# Altium PCB DUTBoard_Sandbox.PcbDoc (part 6 of 6)
Units mil, origin at the board's own origin, x right, y up, seen from the top; angles counter-clockwise.
Board outline 5475 x 5475 mil, 4 copper layers (Top Layer, Mid-Layer 1, Mid-Layer 2, Bottom Layer); 89 components, 507 nets, 1705 pads, 1204 vias.
Unrouted connection lines stored in the file: 6.
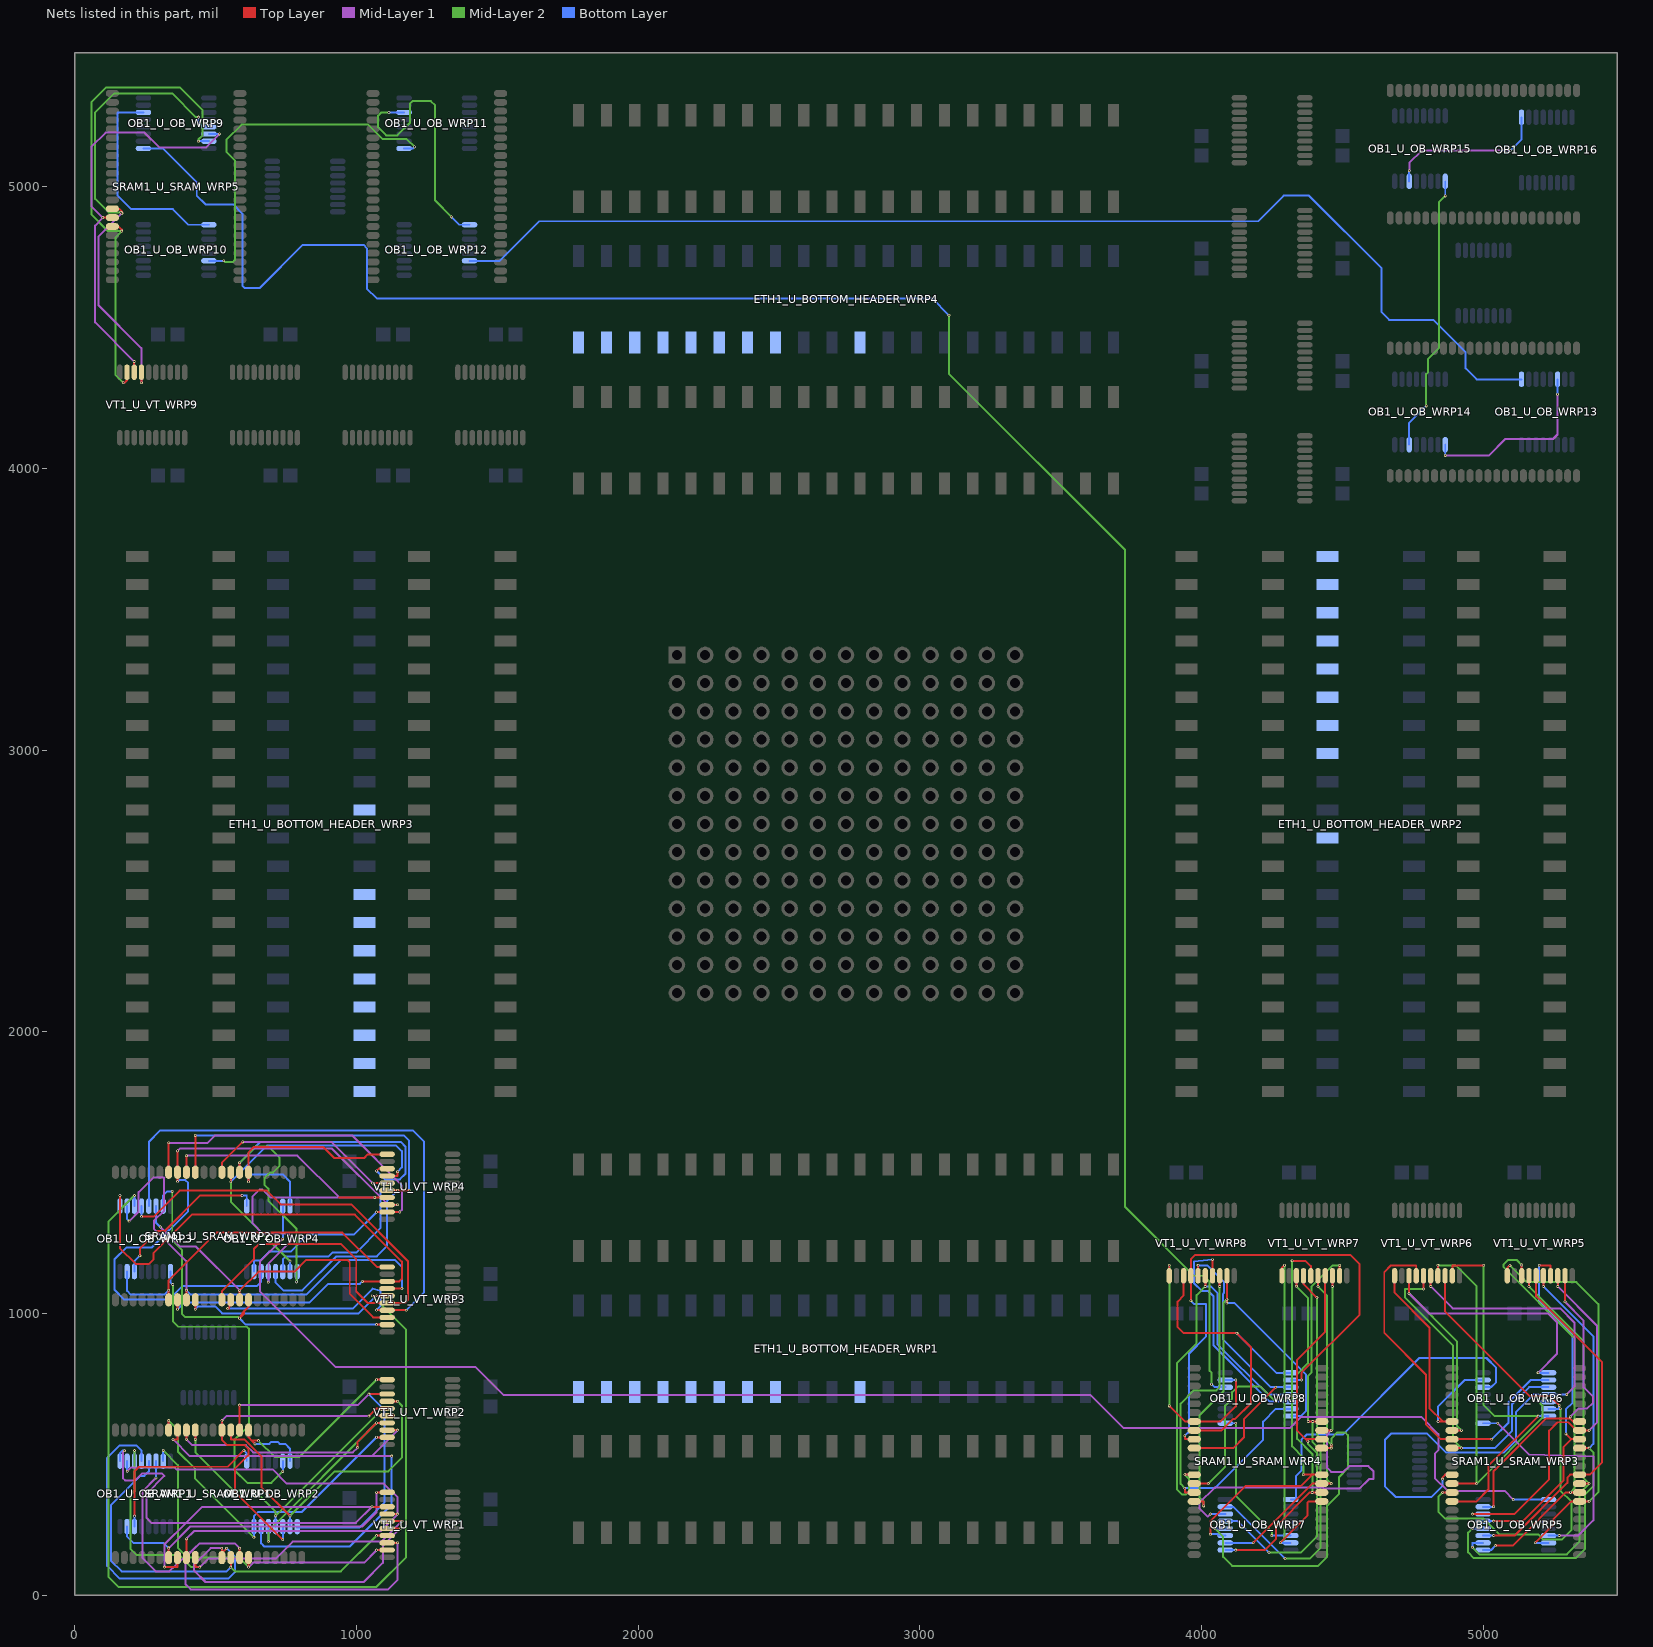
[diagram p8: the nets of this part, all layers, seen from the top]

## Via types
v1: diameter 10, hole 5, Top Layer to Bottom Layer, 1204 vias

## Nets (pads, with @x,y where several pads share a name; then routed paths per layer and width w, separated by ;. In a path a pad name is that pad's centre, name@x,y a point inside that pad or via, vN(x,y) a via of type N, cw(c..) or ccw(c..) an arc to the next point about the centre after c; other vN are vias at no path point) (continued)
OB_D_B61: OB1_U_OB_WRP9.D5 SRAM1_U_SRAM_WRP5.DATA13 VT1_U_VT_WRP9.OVL5 | length 1695.2
  Top Layer w7: SRAM1_U_SRAM_WRP5.DATA13@133.62,4921.26 157.98,4921.26 v1@167.24,4912 ; v1(163.87,4908.63) v1@167.24,4912 ; v1(167.24,4905.26) v1@167.24,4912 ; v1(236.61,4304) VT1_U_VT_WRP9.OVL5@236.61,4341.14
  Mid-Layer 1 w7: v1(167.24,4905.26) 85,4823.02 85,4578 236.61,4426.39 v1(236.61,4304)
  Mid-Layer 2 w7: v1(163.87,4908.63) 120.37,4908.63 72.5,4956.5 72.5,5263.12 140.38,5331 345.5,5331 430,5246.5 v1(439,5246.5)
  Bottom Layer w7: v1(439,5246.5) 439,5221.2 OB1_U_OB_WRP9.D5@476.14,5212.2
OB_D_B62: OB1_U_OB_WRP9.D6 SRAM1_U_SRAM_WRP5.DATA14 VT1_U_VT_WRP9.OVL6 | length 1476.1
  Top Layer w7: v1(100,4889.76) SRAM1_U_SRAM_WRP5.DATA14@133.62,4889.76 ; VT1_U_VT_WRP9.OVL6@211.02,4341.14 v1(211.02,4379)
  Mid-Layer 1 w7: v1(211.02,4379) 72,4518.02 72,4861.76 v1(100,4889.76) 59,4930.76 59,5141 109.52,5191.52 247.48,5191.52 301,5138 465,5138 v1(514,5187)
  Bottom Layer w7: OB1_U_OB_WRP9.D6@476.14,5186.61 513.61,5186.61 v1(514,5187)
OB_D_B63: OB1_U_OB_WRP9.D7 SRAM1_U_SRAM_WRP5.DATA15 VT1_U_VT_WRP9.OVL7 | length 1781.5
  Top Layer w7: SRAM1_U_SRAM_WRP5.DATA15@133.62,4858.27 156,4858.27 167,4847.27 v1(167,4842) ; v1(172,4304) 177.43,4304 185.43,4312 VT1_U_VT_WRP9.OVL7@185.43,4341.14
  Mid-Layer 2 w7: v1(172,4304) 145,4331 145,4820 v1(167,4842) 118,4842 59.5,4900.5 59.5,5300.5 111,5352 373,5352 453.5,5271.5 453.5,5181.7 439,5167.2 v1(439,5161)
  Bottom Layer w7: v1(439,5161) OB1_U_OB_WRP9.D7@476.14,5161.02
OB_D_B64: OB1_U_OB_WRP8.D0 SRAM1_U_SRAM_WRP4.DATA0 VT1_U_VT_WRP8.OVL0 | length 948
  Top Layer w7: VT1_U_VT_WRP8.OVL0@3884.84,1133.86 3884.84,1170.84 v1(3885,1171) ; v1(3885,672) 3940.27,616.73 SRAM1_U_SRAM_WRP4.DATA0@3973.62,616.73 4067.24,616.73 4121,670.49 v1(4121,763.98)
  Mid-Layer 2 w7: v1(3885,672) v1(3885,1171)
  Bottom Layer w7: OB1_U_OB_WRP8.D0@4083.86,763.98 v1(4121,763.98)
OB_D_B65: OB1_U_OB_WRP8.D1 SRAM1_U_SRAM_WRP4.DATA1 VT1_U_VT_WRP8.OVL1 | length 1170.2
  Top Layer w7: VT1_U_VT_WRP8.OVL1@3936.02,1133.86 3936.02,1064 3914.5,1042.48 3914.5,951.5 3936,930 v1(4125,930) 4175,880 4175,682 4119,626 4112,626 4071.24,585.24 SRAM1_U_SRAM_WRP4.DATA1@3973.62,585.24
  Bottom Layer w7: v1(4125,930) 4265.43,789.57 OB1_U_OB_WRP8.D1@4316.14,789.57
OB_D_B66: OB1_U_OB_WRP8.D2 SRAM1_U_SRAM_WRP4.DATA2 VT1_U_VT_WRP8.OVL2 | length 1903.7
  Top Layer w7: v1(3940,566) 3940,553.74 SRAM1_U_SRAM_WRP4.DATA2@3973.62,553.74 ; v1(3961.61,1045.18) VT1_U_VT_WRP8.OVL2@3961.61,1133.86 3961.61,1192 3977.61,1208 4528,1208 4561,1175 4561,996 4354,789 v1(4354,763.98)
  Bottom Layer w7: v1(3940,566) 3955,581 3955,858 4014.5,917.5 4014.5,1034.5 3972.3,1034.5 v1(3961.61,1045.18) ; OB1_U_OB_WRP8.D2@4316.14,763.98 v1(4354,763.98)
OB_D_B67: OB1_U_OB_WRP8.D3 SRAM1_U_SRAM_WRP4.DATA3 VT1_U_VT_WRP8.OVL3 | length 1087.4
  Top Layer w7: SRAM1_U_SRAM_WRP4.DATA3@3973.62,522.24 4112,522.24 4149.61,559.86 4149.61,625 v1(4263,738.39) ; VT1_U_VT_WRP8.OVL3@3987.2,1133.86 v1(3987.2,1171)
  Bottom Layer w7: v1(3987.2,1171) 4020,1171 4079,1112 4079,1073 4075,1069 4075,908.23 4244.84,738.39 v1(4263,738.39) OB1_U_OB_WRP8.D3@4316.14,738.39
OB_D_B68: OB1_U_OB_WRP8.D4 SRAM1_U_SRAM_WRP4.DATA4 VT1_U_VT_WRP8.OVL4 | length 1522.5
  Top Layer w7: v1(3940.24,428) 3940.49,427.76 SRAM1_U_SRAM_WRP4.DATA4@3973.62,427.76 ; v1(4012.8,1096) VT1_U_VT_WRP8.OVL4@4012.8,1133.86
  Mid-Layer 2 w7: v1(3940.24,428) 3955,413.24 3955,368 3945,358 3930,358 3912,376 3912,824 3982,894 3982,1065.2 v1(4012.8,1096)
  Bottom Layer w7: v1(4012.8,1096) 4032.99,1096 4055.49,1073.5 4055.49,891.51 4234.2,712.8 OB1_U_OB_WRP8.D4@4316.14,712.8
OB_D_B69: OB1_U_OB_WRP8.D5 SRAM1_U_SRAM_WRP4.DATA5 VT1_U_VT_WRP8.OVL5 | length 1416
  Top Layer w7: SRAM1_U_SRAM_WRP4.DATA5@3973.62,396.26 v1(4024,396.26) ; VT1_U_VT_WRP8.OVL5@4038.39,1133.86 v1(4038.39,1192)
  Mid-Layer 2 w7: v1(4024,396.26) 4083,455.26 4083,673 4108.34,698.34 4108.34,720.64 4128,740.3 4209.7,740.3 v1(4263,687)
  Bottom Layer w7: v1(4038.39,1192) 3972,1184 3972,1108.3 4000.3,1080 4022.5,1080 4042,1060.5 4042,886.61 4241.41,687.2 v1@4263.2,687.2 ; v1(4263,687) v1@4263.2,687.2 ; OB1_U_OB_WRP8.D5@4316.14,687.2 v1@4263.2,687.2
OB_D_B70: OB1_U_OB_WRP8.D6 SRAM1_U_SRAM_WRP4.DATA6 VT1_U_VT_WRP8.OVL6 | length 1443.5
  Top Layer w7: v1(3940,380) 3940,365 3940.24,364.76 SRAM1_U_SRAM_WRP4.DATA6@3973.62,364.76 ; v1(4063.98,1096) VT1_U_VT_WRP8.OVL6@4063.98,1133.86
  Mid-Layer 2 w7: v1(3940,380) 3925,395 3925,680 3972,727 4052,727 4063.98,738.98 v1(4063.98,1096)
  Bottom Layer w7: v1(3940,380) 4046,380 4218,552 4218,616 4263.61,661.61 OB1_U_OB_WRP8.D6@4316.14,661.61
OB_D_B71: OB1_U_OB_WRP8.D7 SRAM1_U_SRAM_WRP4.DATA7 VT1_U_VT_WRP8.OVL7 | length 1503.3
  Top Layer w7: SRAM1_U_SRAM_WRP4.DATA7@3973.62,333.27 4007.24,333.27 v1(4007.24,317.27) ; v1(4089.57,1037) v1(4089.57,1050) VT1_U_VT_WRP8.OVL7@4089.57,1133.86
  Mid-Layer 2 w7: v1(4007.24,317.27) 4007.24,333.27 3992,348.51 3992,638 4077.5,723.5 4077.5,1037.93 v1(4089.57,1050)
  Bottom Layer w7: v1(4089.57,1037) 4117,1037 4371,783 4371,655.02 4352,636.02 OB1_U_OB_WRP8.D7@4316.14,636.02
OB_D_B72: OB1_U_OB_WRP7.D0 SRAM1_U_SRAM_WRP4.DATA8 VT1_U_VT_WRP7.OVL0 | length 1304.2
  Top Layer w7: v1(4279,186) 4375.23,282.23 4375.23,327.5 4381,333.27 SRAM1_U_SRAM_WRP4.DATA8@4426.38,333.27 ; VT1_U_VT_WRP7.OVL0@4284.84,1133.86 4284.84,1161.84 v1(4294,1171)
  Mid-Layer 2 w7: v1(4279,186) 4294,201 v1(4294,1171)
  Bottom Layer w7: v1(4279,186) OB1_U_OB_WRP7.D0@4316.14,186.02
OB_D_B73: OB1_U_OB_WRP7.D1 SRAM1_U_SRAM_WRP4.DATA9 VT1_U_VT_WRP7.OVL1 | length 1277.8
  Top Layer w7: v1(4121,160) 4224,160 4264,200 4264,244.76 4384,364.76 v1(4392.76,364.76) SRAM1_U_SRAM_WRP4.DATA9@4426.38,364.76 ; v1(4336.02,1096.51) VT1_U_VT_WRP7.OVL1@4336.02,1133.86
  Mid-Layer 2 w7: v1(4336.02,1096.51) 4377,1055.53 4377,823 4339,785 4339,555 4392.76,501.24 v1(4392.76,364.76)
  Bottom Layer w7: OB1_U_OB_WRP7.D1@4083.86,160.43 4120.57,160.43 v1(4121,160)
OB_D_B74: OB1_U_OB_WRP7.D2 SRAM1_U_SRAM_WRP4.DATA10 VT1_U_VT_WRP7.OVL2 | length 1241.6
  Top Layer w7: v1(4182.76,186.02) 4393,396.26 SRAM1_U_SRAM_WRP4.DATA10@4426.38,396.26 v1(4460,396.26) ; VT1_U_VT_WRP7.OVL2@4361.61,1133.86 4361.61,1104 v1(4409,1056.61)
  Mid-Layer 2 w7: v1(4409,1056.61) 4409,570.72 4434.38,545.34 4434.38,520.06 4444.04,510.4 4444.04,412.22 v1(4460,396.26)
  Bottom Layer w7: OB1_U_OB_WRP7.D2@4083.86,186.02 v1(4182.76,186.02)
OB_D_B75: OB1_U_OB_WRP7.D3 SRAM1_U_SRAM_WRP4.DATA11 VT1_U_VT_WRP7.OVL3 | length 1481.1
  Top Layer w7: v1(4031,216.5) 4031,263 4156.18,388.18 4353.42,388.18 4393,427.76 ; v1(4321,1187) 4368,1187 4387.2,1167.8 VT1_U_VT_WRP7.OVL3@4387.2,1133.86 ; v1(4360.76,427.76) 4393,427.76 ; SRAM1_U_SRAM_WRP4.DATA11@4426.38,427.76 4393,427.76
  Mid-Layer 2 w7: v1(4321,1187) 4321,528 4360.76,488.24 v1(4360.76,427.76)
  Bottom Layer w7: v1(4031,216.5) 4055.61,216.5 4060.5,211.61 OB1_U_OB_WRP7.D3@4083.86,211.61
OB_D_B76: OB1_U_OB_WRP7.D4 SRAM1_U_SRAM_WRP4.DATA12 VT1_U_VT_WRP7.OVL4 | length 1780.4
  Top Layer w7: v1(4412.8,1096) VT1_U_VT_WRP7.OVL4@4412.8,1133.86 ; SRAM1_U_SRAM_WRP4.DATA12@4426.38,522.24 v1(4460,522.24) v1(4460,534)
  Mid-Layer 2 w7: v1(4046,237.2) 4076,207.2 4076,136 4108,104 4413,104 4445,136 4445,318 4488,361 4488,419.66 4519,450.66 4519,568 4509,578 4482,578 4460,556 v1(4460,534) ; v1(4412.8,1096) 4445,1063.8 4445,558.34 4448.66,554.68 4448.66,545.34 v1(4460,534) ; v1(4460,522.24) v1(4460,534)
  Bottom Layer w7: v1(4046,237.2) OB1_U_OB_WRP7.D4@4083.86,237.2
OB_D_B77: OB1_U_OB_WRP7.D5 SRAM1_U_SRAM_WRP4.DATA13 VT1_U_VT_WRP7.OVL5 | length 1447.5
  Top Layer w7: v1(4377,546) 4369.26,553.74 ; SRAM1_U_SRAM_WRP4.DATA13@4426.38,553.74 4369.26,553.74 ; VT1_U_VT_WRP7.OVL5@4438.39,1133.86 4438.39,935 4339,835.61 4339,584 4369.26,553.74
  Mid-Layer 2 w7: v1(4238.88,151.92) 4353.08,151.92 4409,207.84 4409,506.23 4377,538.23 v1(4377,546)
  Bottom Layer w7: OB1_U_OB_WRP7.D5@4083.86,262.8 4128,262.8 v1(4238.88,151.92)
OB_D_B78: OB1_U_OB_WRP7.D6 SRAM1_U_SRAM_WRP4.DATA14 VT1_U_VT_WRP7.OVL6 | length 1720.2
  Top Layer w7: SRAM1_U_SRAM_WRP4.DATA14@4426.38,585.24 4459.76,585.24 v1(4460,585) ; v1(4463.98,1096) VT1_U_VT_WRP7.OVL6@4463.98,1133.86
  Mid-Layer 1 w7: v1(4031,288.39) 4021.61,279 3992,308.61 3992,328 4046,382 4430,382 4434,378 4560,378 4594.5,412.5 4609.11,412.5 4609.11,440.89 4592,458 4523,458 4502.7,437.7 4459.3,437.7 4445,452 4445,570 v1(4460,585)
  Mid-Layer 2 w7: v1(4460,585) 4463.98,588.98 v1(4463.98,1096)
  Bottom Layer w7: v1(4031,288.39) OB1_U_OB_WRP7.D6@4083.86,288.39
OB_D_B79: OB1_U_OB_WRP7.D7 SRAM1_U_SRAM_WRP4.DATA15 VT1_U_VT_WRP7.OVL7 | length 1590.8
  Top Layer w7: v1(4378,616.73) v1(4394,616.73) SRAM1_U_SRAM_WRP4.DATA15@4426.38,616.73 ; VT1_U_VT_WRP7.OVL7@4489.57,1133.86 4489.57,1170.13 v1(4490,1170.57)
  Mid-Layer 2 w7: v1(4295.98,130) 4384,130 4422,168 4422,515 4394,543 v1(4394,616.73) ; v1(4378,616.73) 4378,779 4390,791 4390,1096 4464.57,1170.57 v1(4490,1170.57)
  Bottom Layer w7: OB1_U_OB_WRP7.D7@4083.86,313.98 4112,313.98 v1(4295.98,130)
OB_D_B80: OB1_U_OB_WRP6.D0 SRAM1_U_SRAM_WRP3.DATA0 VT1_U_VT_WRP6.OVL0 | length 889.4
  Top Layer w7: VT1_U_VT_WRP6.OVL0@4684.84,1133.86 4684.84,1074 4808.5,950.34 4808.5,663.5 4855.27,616.73 ; v1(4839,616.73) 4855.27,616.73 ; SRAM1_U_SRAM_WRP3.DATA0@4888.62,616.73 4855.27,616.73
  Bottom Layer w7: v1(4839,616.73) 4839,670 4932.98,763.98 OB1_U_OB_WRP6.D0@4998.86,763.98
OB_D_B81: OB1_U_OB_WRP6.D1 SRAM1_U_SRAM_WRP3.DATA1 VT1_U_VT_WRP6.OVL1 | length 1471.5
  Top Layer w7: v1(4736.02,1071) VT1_U_VT_WRP6.OVL1@4736.02,1133.86 ; SRAM1_U_SRAM_WRP3.DATA1@4888.62,585.24 v1(4922.24,585.24)
  Mid-Layer 1 w7: v1(4736.02,1071) 4807.02,1000 5230,1000 5262,968 5262,858 v1(5194,790)
  Mid-Layer 2 w7: v1(4736.02,1071) 4907,900.02 4907,600.48 v1(4922.24,585.24)
  Bottom Layer w7: v1(5194,790) 5194.43,789.57 OB1_U_OB_WRP6.D1@5231.14,789.57
OB_D_B82: OB1_U_OB_WRP6.D2 SRAM1_U_SRAM_WRP3.DATA2 VT1_U_VT_WRP6.OVL2 | length 1349.2
  Top Layer w7: VT1_U_VT_WRP6.OVL2@4761.61,1133.86 4761.61,1171 4672,1171 4648,1147 4648,931 4795.5,783.5 4795.5,606.24 4848,553.74 SRAM1_U_SRAM_WRP3.DATA2@4888.62,553.74 v1(5029.74,553.74)
  Bottom Layer w7: v1(5029.74,553.74) 5089,613 5089,684.98 5168,763.98 OB1_U_OB_WRP6.D2@5231.14,763.98
OB_D_B83: OB1_U_OB_WRP6.D3 SRAM1_U_SRAM_WRP3.DATA3 VT1_U_VT_WRP6.OVL3 | length 1247.8
  Top Layer w7: v1(4787.2,1087) VT1_U_VT_WRP6.OVL3@4787.2,1133.86 ; SRAM1_U_SRAM_WRP3.DATA3@4888.62,522.24 v1(4922.24,522.24)
  Mid-Layer 2 w7: v1(4787.2,1087) 4721.52,1087 4721.52,1057 4892.5,886.02 4892.5,551.99 v1(4922.24,522.24)
  Bottom Layer w7: v1(4922.24,522.24) 5040.24,522.24 5102,584 5102,678.39 5162,738.39 OB1_U_OB_WRP6.D3@5231.14,738.39
OB_D_B84: OB1_U_OB_WRP6.D4 SRAM1_U_SRAM_WRP3.DATA4 VT1_U_VT_WRP6.OVL4 | length 2163.3
  Top Layer w7: v1(4812.8,1096) VT1_U_VT_WRP6.OVL4@4812.8,1133.86 ; v1(4855,412) 4855,418.76 4864,427.76 SRAM1_U_SRAM_WRP3.DATA4@4888.62,427.76
  Mid-Layer 1 w7: v1(4812.8,1096) 4890.8,1018 5273,1018 5323,968 5323,740 v1(5295.8,712.8)
  Bottom Layer w7: v1(4855,412) 4855,388 4816,349 4688,349 4651.42,385.58 4651.42,552.84 4672,573.42 4800.58,573.42 4868,506 5072,506 5116,550 5116,650.8 5178,712.8 OB1_U_OB_WRP6.D4@5231.14,712.8 v1(5295.8,712.8)
OB_D_B85: OB1_U_OB_WRP6.D5 SRAM1_U_SRAM_WRP3.DATA5 VT1_U_VT_WRP6.OVL5 | length 1425.5
  Top Layer w7: VT1_U_VT_WRP6.OVL5@4838.39,1133.86 v1(4838.39,1171) ; SRAM1_U_SRAM_WRP3.DATA5@4888.62,396.26 v1(4976,396.26)
  Mid-Layer 2 w7: v1(4838.39,1171) 4902,1171 4976,1097 v1(4976,396.26) 5209,629.26 5209,673 v1(5194,688)
  Bottom Layer w7: v1(5194,688) 5194.8,687.2 OB1_U_OB_WRP6.D5@5231.14,687.2
OB_D_B86: OB1_U_OB_WRP6.D6 SRAM1_U_SRAM_WRP3.DATA6 VT1_U_VT_WRP6.OVL6 | length 1807.7
  Top Layer w7: v1(4855,365) 4855.24,364.76 SRAM1_U_SRAM_WRP3.DATA6@4888.62,364.76 ; VT1_U_VT_WRP6.OVL6@4863.98,1133.86 4863.98,1007.02 5163,708 5235,708 v1(5269,674)
  Mid-Layer 2 w7: v1(4855,365) 4840,350 4840,296 4863,273 4999,273 5056,216 5194,216 5213,197 5278,197 5313,232 5313,331 5273,371 v1(5273,661.61)
  Bottom Layer w7: OB1_U_OB_WRP6.D6@5231.14,661.61 v1@5269,661.61 ; v1(5269,674) v1@5269,661.61 ; v1(5273,661.61) v1@5269,661.61
OB_D_B87: OB1_U_OB_WRP6.D7 SRAM1_U_SRAM_WRP3.DATA7 VT1_U_VT_WRP6.OVL7 | length 1371.3
  Top Layer w7: SRAM1_U_SRAM_WRP3.DATA7@4888.62,333.27 4976,333.27 5018,375.27 5018,460 v1(5194,636) ; VT1_U_VT_WRP6.OVL7@4889.57,1133.86 4889.57,1171 v1(5001,1171)
  Mid-Layer 2 w7: v1(5001,1171) 5001,675 5040,636 v1(5194,636)
  Bottom Layer w7: v1(5194,636) OB1_U_OB_WRP6.D7@5231.14,636.02
OB_D_B88: OB1_U_OB_WRP5.D0 SRAM1_U_SRAM_WRP3.DATA8 VT1_U_VT_WRP5.OVL0 | length 1435.9
  Top Layer w7: VT1_U_VT_WRP5.OVL0@5084.84,1133.86 5084.84,1161.76 v1(5093.92,1170.84) ; v1(5183.98,186.02) 5248.49,250.54 5248.49,269.76 5312,333.27 SRAM1_U_SRAM_WRP3.DATA8@5341.38,333.27 v1(5375.27,333.27)
  Mid-Layer 2 w7: v1(5093.92,1170.84) 5153.76,1111 5330,1111 5408,1033 5408,366 v1(5375.27,333.27)
  Bottom Layer w7: v1(5183.98,186.02) OB1_U_OB_WRP5.D0@5231.14,186.02
OB_D_B89: OB1_U_OB_WRP5.D1 SRAM1_U_SRAM_WRP3.DATA9 VT1_U_VT_WRP5.OVL1 | length 1464.4
  Top Layer w7: v1(5042.57,176) 5104,176 5292.76,364.76 v1@5309.47,364.76 ; VT1_U_VT_WRP5.OVL1@5136.02,1133.86 v1(5136.02,1172) ; v1(5309.24,365) v1@5309.47,364.76 ; SRAM1_U_SRAM_WRP3.DATA9@5341.38,364.76 v1@5309.47,364.76
  Mid-Layer 2 w7: v1(5136.02,1172) 5117.52,1190.5 5088,1190.5 5070.5,1173 5070.5,1165.5 5323,913 5323,378.76 v1(5309.24,365)
  Bottom Layer w7: OB1_U_OB_WRP5.D1@4998.86,160.43 5027,160.43 v1(5042.57,176)
OB_D_B90: OB1_U_OB_WRP5.D2 SRAM1_U_SRAM_WRP3.DATA10 VT1_U_VT_WRP5.OVL2 | length 1542.8
  Top Layer w7: v1(5161.61,1096) VT1_U_VT_WRP5.OVL2@5161.61,1133.86 ; SRAM1_U_SRAM_WRP3.DATA10@5341.38,396.26 v1(5375,396.26)
  Mid-Layer 2 w7: v1(4961,170) 4986,145 5296,145 5340.88,189.88 5340.88,362.14 v1(5375,396.26) 5356,415.26 5356,901.61 v1(5161.61,1096)
  Bottom Layer w7: v1(4961,170) 4961,186 OB1_U_OB_WRP5.D2@4998.86,186.02
OB_D_B91: OB1_U_OB_WRP5.D3 SRAM1_U_SRAM_WRP3.DATA11 VT1_U_VT_WRP5.OVL3 | length 1300.8
  Top Layer w7: v1(5036,212) 5111.3,212 5298,398.7 5298,417.76 5308,427.76 SRAM1_U_SRAM_WRP3.DATA11@5341.38,427.76 5377.76,427.76 5421.43,471.43 5421.43,826.57 5187.2,1060.8 VT1_U_VT_WRP5.OVL3@5187.2,1133.86
  Bottom Layer w7: OB1_U_OB_WRP5.D3@4998.86,211.61 5035.61,211.61 v1(5036,212)
OB_D_B92: OB1_U_OB_WRP5.D4 SRAM1_U_SRAM_WRP3.DATA12 VT1_U_VT_WRP5.OVL4 | length 1666.4
  Top Layer w7: v1(5212.8,1096) VT1_U_VT_WRP5.OVL4@5212.8,1133.86 ; SRAM1_U_SRAM_WRP3.DATA12@5341.38,522.24 v1(5375,522.24)
  Mid-Layer 2 w7: v1(4961,237) 4946,222 4946,152 4966,132 5328,132 5360,164 5360,357 5390,387 5390,507.24 v1(5375,522.24)
  Bottom Layer w7: v1(4961,237) 4961.2,237.2 OB1_U_OB_WRP5.D4@4998.86,237.2 ; v1(5212.8,1096) 5390,918.8 5390,537.24 v1(5375,522.24)
OB_D_B93: OB1_U_OB_WRP5.D5 SRAM1_U_SRAM_WRP3.DATA13 VT1_U_VT_WRP5.OVL5 | length 1293.9
  Top Layer w7: v1(5036.2,263) 5139,263 5284.55,408.55 5284.55,526.29 5312,553.74 ; v1(5198,1171) 5238.39,1171 VT1_U_VT_WRP5.OVL5@5238.39,1133.86 ; v1(5293,572.74) 5312,553.74 ; SRAM1_U_SRAM_WRP3.DATA13@5341.38,553.74 5312,553.74
  Bottom Layer w7: OB1_U_OB_WRP5.D5@4998.86,262.8 5036,262.8 v1(5036.2,263) ; v1(5198,1171) 5198,1046 5317,927 5317,684 5293,660 v1(5293,572.74)
OB_D_B94: OB1_U_OB_WRP5.D6 SRAM1_U_SRAM_WRP3.DATA14 VT1_U_VT_WRP5.OVL6 | length 1317.1
  Top Layer w7: v1(4961,288) 5109,288 5233,412 5233,584 5263,614 5301.24,614 5330,585.24 SRAM1_U_SRAM_WRP3.DATA14@5341.38,585.24 v1(5375,585.24) ; v1(5263.98,1096) VT1_U_VT_WRP5.OVL6@5263.98,1133.86
  Mid-Layer 1 w7: v1(5263.98,1096) 5402.5,957.48 5402.5,612.74 v1(5375,585.24)
  Bottom Layer w7: v1(4961,288) 4961.39,288.39 OB1_U_OB_WRP5.D6@4998.86,288.39
OB_D_B95: OB1_U_OB_WRP5.D7 SRAM1_U_SRAM_WRP3.DATA15 VT1_U_VT_WRP5.OVL7 | length 1150.8
  Top Layer w7: v1(5036,313.98) 5036,441 5222,627 5308,627 ; v1(5289.57,1041.43) VT1_U_VT_WRP5.OVL7@5289.57,1133.86 ; v1(5308,633) 5308,627 ; SRAM1_U_SRAM_WRP3.DATA15@5341.38,616.73 5318,616.73 5308,627
  Mid-Layer 1 w7: v1(5289.57,1041.43) 5356,975 5356,738 5389.5,704.5 5389.5,684 5367.5,662 5337,662 v1(5308,633)
  Bottom Layer w7: OB1_U_OB_WRP5.D7@4998.86,313.98 v1(5036,313.98)
OB_D_B96: OB1_U_OB_WRP4.D0 SRAM1_U_SRAM_WRP2.DATA0 VT1_U_VT_WRP4.OVL0 | length 895.1
  Top Layer w7: v1(616.73,1467.76) SRAM1_U_SRAM_WRP2.DATA0@616.73,1501.38 616.73,1572 635.73,1591 882,1591 921,1552 1027,1552 1040.16,1565.16 VT1_U_VT_WRP4.OVL0@1108.86,1565.16
  Bottom Layer w7: v1(616.73,1467.76) 616.73,1492.7 739.27,1492.7 763.98,1468 OB1_U_OB_WRP4.D0@763.98,1381.14
OB_D_B97: OB1_U_OB_WRP4.D1 SRAM1_U_SRAM_WRP2.DATA1 VT1_U_VT_WRP4.OVL1 | length 1656.6
  Top Layer w7: v1(585,1535) v1@585.24,1534.76 ; SRAM1_U_SRAM_WRP2.DATA1@585.24,1501.38 v1@585.24,1534.76 ; v1(585.24,1535) v1@585.24,1534.76 ; v1(1071,1506) 1078.98,1513.98 VT1_U_VT_WRP4.OVL1@1108.86,1513.98
  Mid-Layer 2 w7: v1(585,1535) 642,1592 688,1592 726,1554 726,1523 704,1501 694,1501 673,1480 673,1457 687,1443 687,1401 787,1301 v1(787,1112)
  Bottom Layer w7: v1(585.24,1535) 659.24,1609 1157,1609 1174,1592 1174,1496 1154,1476 1101,1476 v1(1071,1506) ; v1(787,1112) 789.57,1114.57 OB1_U_OB_WRP4.D1@789.57,1148.86
OB_D_B98: OB1_U_OB_WRP4.D2 SRAM1_U_SRAM_WRP2.DATA2 VT1_U_VT_WRP4.OVL2 | length 1239.3
  Top Layer w7: v1(553.74,1467.76) SRAM1_U_SRAM_WRP2.DATA2@553.74,1501.38 ; VT1_U_VT_WRP4.OVL2@1108.86,1488.39 1146,1488.39 v1(1146,1503.39)
  Mid-Layer 2 w7: v1(553.74,1467.76) 553.74,1396.26 v1(764,1186)
  Bottom Layer w7: v1(553.74,1467.76) 681.98,1596 1141,1596 1161,1576 1161,1518.39 v1(1146,1503.39) ; OB1_U_OB_WRP4.D2@763.98,1148.86 v1(764,1186)
OB_D_B99: OB1_U_OB_WRP4.D3 SRAM1_U_SRAM_WRP2.DATA3 VT1_U_VT_WRP4.OVL3 | length 1319.3
  Top Layer w7: SRAM1_U_SRAM_WRP2.DATA3@522.24,1501.38 522.24,1534.76 v1(596.49,1609) ; v1(1057,1462.8) VT1_U_VT_WRP4.OVL3@1108.86,1462.8
  Mid-Layer 1 w7: v1(596.49,1609) 910.8,1609 v1(1057,1462.8)
  Bottom Layer w7: OB1_U_OB_WRP4.D3@738.39,1148.86 738.39,1192 748.28,1201.89 899.53,1201.89 914.09,1216.45 998.45,1216.45 1086,1304 1086,1433.8 v1(1057,1462.8)
OB_D_B100: OB1_U_OB_WRP4.D4 SRAM1_U_SRAM_WRP2.DATA4 VT1_U_VT_WRP4.OVL4 | length 1876.8
  Top Layer w7: SRAM1_U_SRAM_WRP2.DATA4@427.76,1501.38 v1(427.76,1632) ; VT1_U_VT_WRP4.OVL4@1108.86,1437.2 v1(1146,1437.2) v1(1187,1437.2)
  Bottom Layer w7: v1(427.76,1632) 1168,1632 1187,1613 v1(1187,1437.2) ; OB1_U_OB_WRP4.D4@712.8,1148.86 712.8,1109.2 740,1082 808.07,1082 929.07,1203 1072,1203 1109,1240 1109,1400.2 v1(1146,1437.2)
OB_D_B101: OB1_U_OB_WRP4.D5 SRAM1_U_SRAM_WRP2.DATA5 VT1_U_VT_WRP4.OVL5 | length 1775.7
  Top Layer w7: SRAM1_U_SRAM_WRP2.DATA5@396.26,1501.38 v1(396.26,1560) ; 938,1412 v1(1065,1412) 1065.39,1411.61 VT1_U_VT_WRP4.OVL5@1108.86,1411.61
  Mid-Layer 1 w7: v1(396.26,1560) 790,1560 938,1412 ; v1(687,1111) 687,1177.1 768,1258.1 768,1274.1 758.6,1283.5 667.5,1283.5 631,1320 631,1416 656,1441 665,1441 694,1412 938,1412 ; v1(1065,1412) 938,1412
  Bottom Layer w7: v1(687,1111) 687.2,1111.2 OB1_U_OB_WRP4.D5@687.2,1148.86
OB_D_B102: OB1_U_OB_WRP4.D6 SRAM1_U_SRAM_WRP2.DATA6 VT1_U_VT_WRP4.OVL6 | length 2195.6
  Top Layer w7: v1(364.76,1468) SRAM1_U_SRAM_WRP2.DATA6@364.76,1501.38 v1(364.76,1577) ; VT1_U_VT_WRP4.OVL6@1108.86,1386.02 v1(1146,1386.02)
  Mid-Layer 1 w7: v1(364.76,1577) 372.76,1585 913,1585 1111.98,1386.02 v1(1146,1386.02)
  Bottom Layer w7: v1(364.76,1468) 370.26,1473.5 392.57,1473.5 402.07,1464 402.07,1363.07 274.1,1235.1 184.1,1235.1 141,1192 141,1084 176,1049 333,1049 381,1097 646.61,1097 661.61,1112 OB1_U_OB_WRP4.D6@661.61,1148.86
OB_D_B103: OB1_U_OB_WRP4.D7 SRAM1_U_SRAM_WRP2.DATA7 VT1_U_VT_WRP4.OVL7 | length 1742.1
  Top Layer w7: SRAM1_U_SRAM_WRP2.DATA7@333.27,1501.38 v1(333.27,1606) ; v1(1071,1360) 1071.43,1360.43 VT1_U_VT_WRP4.OVL7@1108.86,1360.43 v1(1153.43,1360.43)
  Mid-Layer 1 w7: v1(333.27,1606) 472,1606 498,1632 984,1632 1161,1455 1161,1368 v1(1153.43,1360.43)
  Bottom Layer w7: OB1_U_OB_WRP4.D7@636.02,1148.86 636.02,1188 658,1188 690,1220 766,1220 826,1280 991,1280 v1(1071,1360)
OB_D_B104: OB1_U_OB_WRP3.D0 SRAM1_U_SRAM_WRP2.DATA8 VT1_U_VT_WRP3.OVL0 | length 1193.2
  Top Layer w7: SRAM1_U_SRAM_WRP2.DATA8@333.27,1048.62 v1(333.27,1082.24) 333.27,1118 502.27,1287 950.16,1287 1072,1165.16 VT1_U_VT_WRP3.OVL0@1108.86,1165.16
  Bottom Layer w7: OB1_U_OB_WRP3.D0@186.02,1148.86 186.02,1080 199.02,1067 318.02,1067 v1(333.27,1082.24)
OB_D_B105: OB1_U_OB_WRP3.D1 SRAM1_U_SRAM_WRP2.DATA9 VT1_U_VT_WRP3.OVL1 | length 2340
  Top Layer w7: v1(160,1419) 160,1232 216,1176 264,1176 280,1192 280,1215 416,1351 994,1351 1161,1184 1161,1122.98 1152,1113.98 VT1_U_VT_WRP3.OVL1@1108.86,1113.98 v1(1021,1113.98) ; v1(364.76,1015) SRAM1_U_SRAM_WRP2.DATA9@364.76,1048.62
  Bottom Layer w7: v1(160,1419) 160.43,1418.57 OB1_U_OB_WRP3.D1@160.43,1381.14 ; v1(364.76,1015) 389.26,1039.5 834,1039.5 899.5,1105 1012.02,1105 v1(1021,1113.98)
OB_D_B106: OB1_U_OB_WRP3.D2 SRAM1_U_SRAM_WRP2.DATA10 VT1_U_VT_WRP3.OVL2 | length 1742.1
  Top Layer w7: SRAM1_U_SRAM_WRP2.DATA10@396.26,1048.62 v1(396.26,1082.24) ; VT1_U_VT_WRP3.OVL2@1108.86,1088.39 v1(1161,1088.39)
  Mid-Layer 1 w7: v1(193,1328) 227,1362 227,1430.64 278.63,1482.27 317,1482.27 317,1364.87 280.57,1328.45 280.57,1301.43 396.26,1185.74 v1(396.26,1082.24)
  Bottom Layer w7: OB1_U_OB_WRP3.D2@186.02,1381.14 186.02,1334.98 v1(193,1328) ; v1(396.26,1082.24) 411.5,1067 822,1067 944.5,1189.5 1137.5,1189.5 1161,1166 v1(1161,1088.39)
OB_D_B107: OB1_U_OB_WRP3.D3 SRAM1_U_SRAM_WRP2.DATA11 VT1_U_VT_WRP3.OVL3 | length 4291.1
  Top Layer w7: v1(427.76,1015) SRAM1_U_SRAM_WRP2.DATA11@427.76,1048.62 ; v1(1056,1062.8) v1(1069.8,1062.8) VT1_U_VT_WRP3.OVL3@1108.86,1062.8
  Mid-Layer 2 w7: v1(212,1419) 119,1326 119,66 155,30 1071,30 1176,135 1176,942.8 v1(1056,1062.8)
  Bottom Layer w7: OB1_U_OB_WRP3.D3@211.61,1381.14 211.61,1418.61 v1(212,1419) ; v1(427.76,1015) 437.76,1025 498.5,1025 523,1000.5 1007.5,1000.5 v1(1069.8,1062.8)
OB_D_B108: OB1_U_OB_WRP3.D4 SRAM1_U_SRAM_WRP2.DATA12 VT1_U_VT_WRP3.OVL4 | length 2202.2
  Top Layer w7: v1(237,1344) 280,1344 372,1436 682,1436 731,1387 982,1387 1182.65,1186.35 1182.65,1047 1172.85,1037.2 VT1_U_VT_WRP3.OVL4@1108.86,1037.2 1040,1037.2 999.16,1078.05 999.16,1192 945.16,1246 653,1246 636,1229 636,1192 522.24,1078.24 SRAM1_U_SRAM_WRP2.DATA12@522.24,1048.62
  Bottom Layer w7: v1(237,1344) 237.2,1344.2 OB1_U_OB_WRP3.D4@237.2,1381.14
OB_D_B109: OB1_U_OB_WRP3.D5 SRAM1_U_SRAM_WRP2.DATA13 VT1_U_VT_WRP3.OVL5 | length 2653.8
  Top Layer w7: v1(542.37,1017.37) 547.1,1017.37 SRAM1_U_SRAM_WRP2.DATA13@553.74,1048.62 ; v1(1071,1012) 1071.39,1011.61 VT1_U_VT_WRP3.OVL5@1108.86,1011.61 v1(1176.61,1011.61)
  Bottom Layer w7: OB1_U_OB_WRP3.D5@262.8,1381.14 262.8,1608.8 304,1650 1200,1650 1240,1610 1240,1075 v1(1176.61,1011.61) ; v1(542.37,1017.37) 986.37,1017.37 1057,1088 1086,1080 1086,1027 v1(1071,1012)
OB_D_B110: OB1_U_OB_WRP3.D6 SRAM1_U_SRAM_WRP2.DATA14 VT1_U_VT_WRP3.OVL6 | length 1207.3
  Top Layer w7: SRAM1_U_SRAM_WRP2.DATA14@585.24,1048.62 v1(585.24,1082) 652.24,1149 780,1149 821,1190 968,1190 976,1182 976,1069.34 1059.32,986.02 VT1_U_VT_WRP3.OVL6@1108.86,986.02
  Mid-Layer 1 w7: v1(304,1307) 374,1237 430.24,1237 v1(585.24,1082)
  Bottom Layer w7: OB1_U_OB_WRP3.D6@288.39,1381.14 288.39,1322.61 v1(304,1307)
OB_D_B111: OB1_U_OB_WRP3.D7 SRAM1_U_SRAM_WRP2.DATA15 VT1_U_VT_WRP3.OVL7 | length 1377.6
  Top Layer w7: SRAM1_U_SRAM_WRP2.DATA15@616.73,1048.62 616.73,1023.73 600.73,1007.73 ; v1(1071,960.43) VT1_U_VT_WRP3.OVL7@1108.86,960.43 ; 600.73,1007.73 v1(584.73,983) 600.73,999 600.73,1007.73
  Mid-Layer 2 w7: v1(346,1433.5) 346,1260.01 380,1226.01 380,999 392,987 580.73,987 v1(584.73,983)
  Bottom Layer w7: OB1_U_OB_WRP3.D7@313.98,1381.14 313.98,1418.98 328.5,1433.5 v1(346,1433.5) ; v1(584.73,983) 607.3,960.43 v1(1071,960.43)
OB_D_B112: OB1_U_OB_WRP2.D0 SRAM1_U_SRAM_WRP1.DATA0 VT1_U_VT_WRP2.OVL0 | length 859.6
  Top Layer w7: SRAM1_U_SRAM_WRP1.DATA0@616.73,586.38 616.73,560 627.73,549 ; v1(639.73,537) 627.73,549 ; v1(652,549) 627.73,549 ; v1(1071,765.16) VT1_U_VT_WRP2.OVL0@1108.86,765.16
  Mid-Layer 2 w7: v1(652,549) 711,490 795.84,490 v1(1071,765.16)
  Bottom Layer w7: v1(639.73,537) 691.09,537 698.3,544.2 720.09,544.2 727.3,537 746.98,537 763.98,520 OB1_U_OB_WRP2.D0@763.98,476.14
OB_D_B113: OB1_U_OB_WRP2.D1 SRAM1_U_SRAM_WRP1.DATA1 VT1_U_VT_WRP2.OVL1 | length 1386.3
  Top Layer w7: SRAM1_U_SRAM_WRP1.DATA1@585.24,586.38 v1(585.24,675) ; v1(1044,713.98) VT1_U_VT_WRP2.OVL1@1108.86,713.98
  Mid-Layer 1 w7: v1(585.24,675) 1005.02,675 v1(1044,713.98)
  Bottom Layer w7: OB1_U_OB_WRP2.D1@789.57,243.86 789.57,240 1010,240 1099,329 1099,658.98 v1(1044,713.98)
OB_D_B114: OB1_U_OB_WRP2.D2 SRAM1_U_SRAM_WRP1.DATA2 VT1_U_VT_WRP2.OVL2 | length 1184.2
  Top Layer w7: SRAM1_U_SRAM_WRP1.DATA2@553.74,586.38 553.74,553 602,553 662,493 662,383.39 v1(763.98,281.42) ; VT1_U_VT_WRP2.OVL2@1108.86,688.39 v1(1146,688.39)
  Mid-Layer 2 w7: v1(763.98,281.42) 922.56,440 1113,440 1161,488 1161,673.39 v1(1146,688.39)
  Bottom Layer w7: OB1_U_OB_WRP2.D2@763.98,243.86 v1(763.98,281.42)
OB_D_B115: OB1_U_OB_WRP2.D3 SRAM1_U_SRAM_WRP1.DATA3 VT1_U_VT_WRP2.OVL3 | length 1240
  Top Layer w7: v1(522.24,620) SRAM1_U_SRAM_WRP1.DATA3@522.24,586.38 522.24,552 541.26,532.99 603.63,532.99 616,520.61 616,496.72 568,448.72 568,367.39 v1(738.39,197) ; v1(1044.2,636) 1071,662.8 VT1_U_VT_WRP2.OVL3@1108.86,662.8
  Mid-Layer 1 w7: v1(522.24,620) 538.24,636 v1(1044.2,636)
  Bottom Layer w7: v1(738.39,197) OB1_U_OB_WRP2.D3@738.39,243.86
OB_D_B116: OB1_U_OB_WRP2.D4 SRAM1_U_SRAM_WRP1.DATA4 VT1_U_VT_WRP2.OVL4 | length 1047.3
  Top Layer w7: v1(427.76,553.24) SRAM1_U_SRAM_WRP1.DATA4@427.76,586.38 ; v1(1068.58,637.2) VT1_U_VT_WRP2.OVL4@1108.86,637.2
  Mid-Layer 2 w7: v1(427.76,553.24) 427.76,507.24 563.15,371.85 636.94,371.85 712.8,296 v1(712.8,281.42) v1(1068.58,637.2)
  Bottom Layer w7: OB1_U_OB_WRP2.D4@712.8,243.86 v1(712.8,281.42)
  other v1: 712.8,281.42
OB_D_B117: OB1_U_OB_WRP2.D5 SRAM1_U_SRAM_WRP1.DATA5 VT1_U_VT_WRP2.OVL5 | length 1454.3
  Top Layer w7: v1(396.26,553) SRAM1_U_SRAM_WRP1.DATA5@396.26,586.38 ; v1(1004,524) 1004,544.61 v1(1071,611.61) VT1_U_VT_WRP2.OVL5@1108.86,611.61
  Mid-Layer 1 w7: v1(396.26,553) 416.26,533 607,533 633,507 987,507 v1(1004,524)
  Mid-Layer 2 w7: v1(687.2,190.3) 687.2,227.82 v1(1071,611.61)
  Bottom Layer w7: v1(687.2,190.3) OB1_U_OB_WRP2.D5@687.2,243.86
OB_D_B118: OB1_U_OB_WRP2.D6 SRAM1_U_SRAM_WRP1.DATA6 VT1_U_VT_WRP2.OVL6 | length 1778.6
  Top Layer w7: v1(348.76,553) 364.76,553 SRAM1_U_SRAM_WRP1.DATA6@364.76,586.38 ; VT1_U_VT_WRP2.OVL6@1108.86,586.02 v1(1146,586.02)
  Mid-Layer 1 w7: v1(348.76,553) 407.76,494 1053.98,494 ; v1(1125,494) 1053.98,494 ; v1(1146,586.02) 1053.98,494
  Bottom Layer w7: OB1_U_OB_WRP2.D6@661.61,243.86 661.61,184.39 673,173 976,173 1125,322 v1(1125,494)
OB_D_B119: OB1_U_OB_WRP2.D7 SRAM1_U_SRAM_WRP1.DATA7 VT1_U_VT_WRP2.OVL7 | length 1236
  Top Layer w7: SRAM1_U_SRAM_WRP1.DATA7@333.27,586.38 v1(333.27,620) ; v1(1071,560.43) VT1_U_VT_WRP2.OVL7@1108.86,560.43
  Mid-Layer 2 w7: v1(333.27,620) 365.76,587.51 365.76,510.24 426,450 426,416 v1(636,206)
  Bottom Layer w7: v1(636,206) OB1_U_OB_WRP2.D7@636.02,243.86 636.02,280 652.02,296 806.57,296 v1(1071,560.43)
OB_D_B120: OB1_U_OB_WRP1.D0 SRAM1_U_SRAM_WRP1.DATA8 VT1_U_VT_WRP1.OVL0 | length 1132.3
  Top Layer w7: SRAM1_U_SRAM_WRP1.DATA8@333.27,133.62 v1(333.27,167.24) ; v1(1071,365.16) VT1_U_VT_WRP1.OVL0@1108.86,365.16
  Mid-Layer 1 w7: v1(333.27,167.24) 410.02,244 1020,244 1071,295 v1(1071,365.16)
  Bottom Layer w7: OB1_U_OB_WRP1.D0@186.02,243.86 186.02,207.98 208,186 314.51,186 v1(333.27,167.24)
OB_D_B121: OB1_U_OB_WRP1.D1 SRAM1_U_SRAM_WRP1.DATA9 VT1_U_VT_WRP1.OVL1 | length 2323.3
  Top Layer w7: v1(318,100) 364.76,100 SRAM1_U_SRAM_WRP1.DATA9@364.76,133.62 ; v1(1055,313.98) VT1_U_VT_WRP1.OVL1@1108.86,313.98
  Mid-Layer 1 w7: v1(176,513) 171,508 171,416 179,408 214,408 238,432 310,432 318,424 254.91,360.91 254.91,274.09 272,257 395,257 ; v1(318,100) 318,180 395,257 ; 395,257 451.98,313.98 v1(1055,313.98) 998.02,257 395,257
  Bottom Layer w7: OB1_U_OB_WRP1.D1@160.43,476.14 160.43,504 169.43,513 v1(176,513)
OB_D_B122: OB1_U_OB_WRP1.D2 SRAM1_U_SRAM_WRP1.DATA10 VT1_U_VT_WRP1.OVL2 | length 1995.2
  Top Layer w7: SRAM1_U_SRAM_WRP1.DATA10@396.26,133.62 v1(396.26,200) ; VT1_U_VT_WRP1.OVL2@1108.86,288.39 1145.61,288.39 v1(1146,288)
  Mid-Layer 1 w7: v1(186.02,439.95) 200.07,454 354,454 361,447 702,447 753,396 1097,396 1146,347 v1(1146,288) 1086,228 424.26,228 v1(396.26,200)
  Bottom Layer w7: v1(186.02,439.95) OB1_U_OB_WRP1.D2@186.02,476.14
OB_D_B123: OB1_U_OB_WRP1.D3 SRAM1_U_SRAM_WRP1.DATA11 VT1_U_VT_WRP1.OVL3 | length 1552.8
  Top Layer w7: SRAM1_U_SRAM_WRP1.DATA11@427.76,133.62 427.76,100 v1(443.76,100) ; VT1_U_VT_WRP1.OVL3@1108.86,262.8 v1(1161,262.8)
  Mid-Layer 1 w7: v1(443.76,100) 473.76,130 713,130 773,190 1088.2,190 v1(1161,262.8)
  Mid-Layer 2 w7: v1(212,513.61) 212,370 197,355 197,165 219,143 371,143 414,100 v1(443.76,100)
  Bottom Layer w7: OB1_U_OB_WRP1.D3@211.61,476.14 211.61,513.61 v1(212,513.61)
OB_D_B124: OB1_U_OB_WRP1.D4 SRAM1_U_SRAM_WRP1.DATA12 VT1_U_VT_WRP1.OVL4 | length 2256
  Top Layer w7: v1(522,167) 522.24,166.76 SRAM1_U_SRAM_WRP1.DATA12@522.24,156 ; SRAM1_U_SRAM_WRP1.DATA12@522.24,133.62 SRAM1_U_SRAM_WRP1.DATA12@522.24,156 ; v1(539,167) 528,156 SRAM1_U_SRAM_WRP1.DATA12@522.24,156 ; VT1_U_VT_WRP1.OVL4@1108.86,237.2 v1(1156,237.2)
  Mid-Layer 1 w7: v1(522,167) 482,167 424,109 424,87 464,47 1025.8,47 1093.8,115 1093.8,175 v1(1156,237.2)
  Bottom Layer w7: OB1_U_OB_WRP1.D4@237.2,476.14 237.2,513 218.2,532 159,532 115,488 115,104 160,59 544,59 569,84 569,137 v1(539,167)
OB_D_B125: OB1_U_OB_WRP1.D5 SRAM1_U_SRAM_WRP1.DATA13 VT1_U_VT_WRP1.OVL5 | length 1512.7
  Top Layer w7: v1(553.74,100) SRAM1_U_SRAM_WRP1.DATA13@553.74,133.62 ; v1(1071,211.61) VT1_U_VT_WRP1.OVL5@1108.86,211.61
  Mid-Layer 2 w7: v1(553.74,100) 568.74,85 944.39,85 v1(1071,211.61)
  Bottom Layer w7: OB1_U_OB_WRP1.D5@262.8,476.14 262.8,440 246.8,424 232,424 128,320 128,123 166,85 538.74,85 v1(553.74,100)
OB_D_B126: OB1_U_OB_WRP1.D6 SRAM1_U_SRAM_WRP1.DATA14 VT1_U_VT_WRP1.OVL6 | length 1915
  Top Layer w7: SRAM1_U_SRAM_WRP1.DATA14@585.24,133.62 v1(585.24,167) ; VT1_U_VT_WRP1.OVL6@1108.86,186.02 v1(1145.98,186)
  Mid-Layer 1 w7: v1(288.39,416.39) 241,369 241,132 288,85 336,85 443,184 ; v1(585.24,167) 568.24,184 443,184 ; v1(1145.98,186) 1145.98,54.98 1112,21 411,21 393,39 393,134 443,184
  Bottom Layer w7: v1(288.39,416.39) OB1_U_OB_WRP1.D6@288.39,476.14
OB_D_B127: OB1_U_OB_WRP1.D7 SRAM1_U_SRAM_WRP1.DATA15 VT1_U_VT_WRP1.OVL7 | length 1235.1
  Top Layer w7: v1(616.73,100) SRAM1_U_SRAM_WRP1.DATA15@616.73,133.62 ; v1(1071,160) 1071.43,160.43 VT1_U_VT_WRP1.OVL7@1108.86,160.43
  Mid-Layer 1 w7: v1(616.73,100) 632.73,116 1027,116 v1(1071,160)
  Mid-Layer 2 w7: v1(314,514) 366,462 366,168 400,134 582.73,134 v1(616.73,100)
  Bottom Layer w7: OB1_U_OB_WRP1.D7@313.98,476.14 v1(314,514)
OUTSIDE_W16_U_BOTTOM_HEADER_WRP1: ETH1_U_BOTTOM_HEADER_WRP1.40
OUTSIDE_W16_U_BOTTOM_HEADER_WRP2: ETH1_U_BOTTOM_HEADER_WRP2.40
OUTSIDE_W16_U_BOTTOM_HEADER_WRP3: ETH1_U_BOTTOM_HEADER_WRP3.40
OUTSIDE_W16_U_BOTTOM_HEADER_WRP4: ETH1_U_BOTTOM_HEADER_WRP4.40
OUTSIDE_W17_U_BOTTOM_HEADER_WRP1: ETH1_U_BOTTOM_HEADER_WRP1.39
OUTSIDE_W17_U_BOTTOM_HEADER_WRP2: ETH1_U_BOTTOM_HEADER_WRP2.39
OUTSIDE_W17_U_BOTTOM_HEADER_WRP3: ETH1_U_BOTTOM_HEADER_WRP3.39
OUTSIDE_W17_U_BOTTOM_HEADER_WRP4: ETH1_U_BOTTOM_HEADER_WRP4.39
OUTSIDE_W18_U_BOTTOM_HEADER_WRP1: ETH1_U_BOTTOM_HEADER_WRP1.38
OUTSIDE_W18_U_BOTTOM_HEADER_WRP2: ETH1_U_BOTTOM_HEADER_WRP2.38
OUTSIDE_W18_U_BOTTOM_HEADER_WRP3: ETH1_U_BOTTOM_HEADER_WRP3.38
OUTSIDE_W18_U_BOTTOM_HEADER_WRP4: ETH1_U_BOTTOM_HEADER_WRP4.38
OUTSIDE_W19_U_BOTTOM_HEADER_WRP1: ETH1_U_BOTTOM_HEADER_WRP1.37
OUTSIDE_W19_U_BOTTOM_HEADER_WRP2: ETH1_U_BOTTOM_HEADER_WRP2.37
OUTSIDE_W19_U_BOTTOM_HEADER_WRP3: ETH1_U_BOTTOM_HEADER_WRP3.37
OUTSIDE_W19_U_BOTTOM_HEADER_WRP4: ETH1_U_BOTTOM_HEADER_WRP4.37
OUTSIDE_W20_U_BOTTOM_HEADER_WRP1: ETH1_U_BOTTOM_HEADER_WRP1.36
OUTSIDE_W20_U_BOTTOM_HEADER_WRP2: ETH1_U_BOTTOM_HEADER_WRP2.36
OUTSIDE_W20_U_BOTTOM_HEADER_WRP3: ETH1_U_BOTTOM_HEADER_WRP3.36
OUTSIDE_W20_U_BOTTOM_HEADER_WRP4: ETH1_U_BOTTOM_HEADER_WRP4.36
OUTSIDE_W21_U_BOTTOM_HEADER_WRP1: ETH1_U_BOTTOM_HEADER_WRP1.35
OUTSIDE_W21_U_BOTTOM_HEADER_WRP2: ETH1_U_BOTTOM_HEADER_WRP2.35
OUTSIDE_W21_U_BOTTOM_HEADER_WRP3: ETH1_U_BOTTOM_HEADER_WRP3.35
OUTSIDE_W21_U_BOTTOM_HEADER_WRP4: ETH1_U_BOTTOM_HEADER_WRP4.35
OUTSIDE_W22_U_BOTTOM_HEADER_WRP1: ETH1_U_BOTTOM_HEADER_WRP1.34
OUTSIDE_W22_U_BOTTOM_HEADER_WRP2: ETH1_U_BOTTOM_HEADER_WRP2.34
OUTSIDE_W22_U_BOTTOM_HEADER_WRP3: ETH1_U_BOTTOM_HEADER_WRP3.34
OUTSIDE_W22_U_BOTTOM_HEADER_WRP4: ETH1_U_BOTTOM_HEADER_WRP4.34
OUTSIDE_W23_U_BOTTOM_HEADER_WRP1: ETH1_U_BOTTOM_HEADER_WRP1.33
OUTSIDE_W23_U_BOTTOM_HEADER_WRP2: ETH1_U_BOTTOM_HEADER_WRP2.33
OUTSIDE_W23_U_BOTTOM_HEADER_WRP3: ETH1_U_BOTTOM_HEADER_WRP3.33
OUTSIDE_W23_U_BOTTOM_HEADER_WRP4: ETH1_U_BOTTOM_HEADER_WRP4.33
OUTSIDE_W26\_U_BOTTOM_HEADER_WRP1: ETH1_U_BOTTOM_HEADER_WRP1.30
OUTSIDE_W26\_U_BOTTOM_HEADER_WRP2: ETH1_U_BOTTOM_HEADER_WRP2.30
OUTSIDE_W26\_U_BOTTOM_HEADER_WRP3: ETH1_U_BOTTOM_HEADER_WRP3.30
OUTSIDE_W26\_U_BOTTOM_HEADER_WRP4: ETH1_U_BOTTOM_HEADER_WRP4.30
SER0: OB1_U_OB_WRP15.DS OB1_U_OB_WRP16.Q | length 576.4
  Mid-Layer 1 w7: v1(4737,5056) 4737,5084 4781,5128 v1(5095,5128)
  Bottom Layer w7: OB1_U_OB_WRP15.DS@4736.61,5018.86 4736.61,5055.61 v1(4737,5056) ; v1(5095,5128) 5135.43,5168.43 OB1_U_OB_WRP16.Q@5135.43,5246.14
SER1: OB1_U_OB_WRP14.DS OB1_U_OB_WRP15.Q | length 988
  Mid-Layer 2 w7: v1(4797,4221.39) 4797,4334 4802.5,4339.5 4802.5,4387.5 4843,4428 4843,4945.43 v1(4864.57,4967)
  Bottom Layer w7: OB1_U_OB_WRP14.DS@4736.61,4083.86 4736.61,4161 v1(4797,4221.39) ; v1(4864.57,4967) OB1_U_OB_WRP15.Q@4864.57,5018.86
SER2: OB1_U_OB_WRP13.DS OB1_U_OB_WRP14.Q | length 663.2
  Mid-Layer 1 w7: v1(4864.57,4046) 5020,4046 5078,4104 5247,4104 5263,4120 v1(5263,4263)
  Bottom Layer w7: v1(4864.57,4046) OB1_U_OB_WRP14.Q@4864.57,4083.86 ; v1(5263,4263) 5263.39,4263.39 OB1_U_OB_WRP13.DS@5263.39,4316.14
SER3: OB1_U_OB_WRP12.DS OB1_U_OB_WRP13.Q | length 4225.3
  Bottom Layer w7: OB1_U_OB_WRP12.DS@1401.14,4736.61 1508,4736.61 1648.39,4877 4200,4877 4291,4968 4381,4968 4638.59,4710.41 4638.59,4554.12 4665.59,4527.12 4821.88,4527.12 4937,4412 4937,4355 4976,4316 5135.43,4316 OB1_U_OB_WRP13.Q@5135.43,4316.14
SER4: OB1_U_OB_WRP11.DS OB1_U_OB_WRP12.Q | length 944.1
  Mid-Layer 2 w7: v1(1115,5263) 1088,5263 1077,5252 1077,5210.2 1105.5,5181.7 1144.72,5181.7 1190.5,5227.48 1190.5,5295.14 1198.8,5303.43 1264,5303.43 1279,5288.43 1279,4950.57 v1(1337,4892.57)
  Bottom Layer w7: v1(1115,5263) 1115.39,5263.39 OB1_U_OB_WRP11.DS@1168.86,5263.39 ; v1(1337,4892.57) 1365,4864.57 OB1_U_OB_WRP12.Q@1401.14,4864.57
SER5: OB1_U_OB_WRP10.DS OB1_U_OB_WRP11.Q | length 1298
  Mid-Layer 2 w7: v1(529,4736.61) 533.61,4732 560,4732 568,4740 568,5093.5 538,5123.5 538,5166 592,5220 1041.2,5220 1092.5,5168.7 1178.3,5168.7 v1(1206,5141)
  Bottom Layer w7: OB1_U_OB_WRP10.DS@476.14,4736.61 v1(529,4736.61) ; OB1_U_OB_WRP11.Q@1168.86,5135.43 1200.43,5135.43 v1(1206,5141)
SER6: OB1_U_OB_WRP9.DS OB1_U_OB_WRP10.Q | length 753.4
  Bottom Layer w7: OB1_U_OB_WRP9.DS@243.86,5263.39 153.39,5263.39 152,5262 152,4968 200,4920 348,4920 403.43,4864.57 OB1_U_OB_WRP10.Q@476.14,4864.57
SER7: OB1_U_OB_WRP8.DS OB1_U_OB_WRP9.Q | length 7746
  Mid-Layer 2 w7: v1(3103,4543) 3103,4335 3728,3710 3728,1378 3972,1134 4006,1134 4028,1112 4028,796 4035,789 v1(4035,749)
  Bottom Layer w7: OB1_U_OB_WRP9.Q@243.86,5135.43 313,5135.43 433,5015.43 433,4968 464,4937 562,4937 595,4904 595,4648 603,4640 656,4640 809,4793 1025,4793 1037,4781 1037,4638 1072,4603 3043,4603 v1(3103,4543) ; v1(4035,749) 4045.61,738.39 OB1_U_OB_WRP8.DS@4083.86,738.39
SER8: OB1_U_OB_WRP7.DS OB1_U_OB_WRP8.Q | length 556.1
  Mid-Layer 2 w7: v1(4121,610.43) 4121,352.59 4249,224.59 v1(4249,211.61)
  Bottom Layer w7: OB1_U_OB_WRP8.Q@4083.86,610.43 v1(4121,610.43) ; v1(4249,211.61) OB1_U_OB_WRP7.DS@4316.14,211.61
SER9: OB1_U_OB_WRP6.DS OB1_U_OB_WRP7.Q | length 1169
  Bottom Layer w7: OB1_U_OB_WRP7.Q@4316.14,339.57 4334,339.57 4334,422.26 4354,442.26 4354,552 4372,570 4500,570 4772,842 5011,842 5045,808 5045,756.39 5027,738.39 OB1_U_OB_WRP6.DS@4998.86,738.39
SER10: OB1_U_OB_WRP5.DS OB1_U_OB_WRP6.Q | length 845.4
  Mid-Layer 1 w7: v1(5050.64,610.43) 5161.08,500 5390,493.01 5390,266 5336,212 v1(5269,212)
  Bottom Layer w7: OB1_U_OB_WRP6.Q@4998.86,610.43 v1(5050.64,610.43) ; OB1_U_OB_WRP5.DS@5231.14,211.61 5268.61,211.61 v1(5269,212)
SER11: OB1_U_OB_WRP4.DS OB1_U_OB_WRP5.Q | length 5358.2
  Mid-Layer 1 w7: v1(738.39,1264.64) 656.7,1182.96 656.7,1079.3 926,810 1423,810 1523,710 3606,710 3722,594 4314,594 4352,632 4780.5,632 4840.5,572 4840.5,515 4827.5,502 4827.5,415.26 4872.69,370.07 5075.43,370.07 v1(5105.93,339.57)
  Bottom Layer w7: v1(738.39,1264.64) OB1_U_OB_WRP4.DS@738.39,1381.14 ; v1(5105.93,339.57) OB1_U_OB_WRP5.Q@5231.14,339.57
SER12: OB1_U_OB_WRP3.DS OB1_U_OB_WRP4.Q | length 584.8
  Top Layer w7: v1(231,1205) 231,1230.52 292.98,1292.5 318.5,1292.5 445,1419 v1(594,1419)
  Bottom Layer w7: OB1_U_OB_WRP3.DS@211.61,1148.86 211.61,1185.61 v1(231,1205) ; v1(594,1419) 610,1419 610.43,1418.57 OB1_U_OB_WRP4.Q@610.43,1381.14
SER13: OB1_U_OB_WRP2.DS OB1_U_OB_WRP3.Q | length 1227.9
  Mid-Layer 2 w7: v1(348,1103) 348,973 368,953 611,953 619,945 619,604 566.93,551.93 566.93,444.37 612.31,399 698,399 v1(738.39,439.39)
  Bottom Layer w7: OB1_U_OB_WRP3.Q@339.57,1148.86 339.57,1111.43 v1(348,1103) ; v1(738.39,439.39) OB1_U_OB_WRP2.DS@738.39,476.14
SER14: OB1_U_OB_WRP1.DS OB1_U_OB_WRP2.Q | length 657.4
  Top Layer w7: v1(212,281) 212,440 228,456 542.43,456 v1(600.43,514)
  Bottom Layer w7: OB1_U_OB_WRP1.DS@211.61,243.86 211.61,280.61 v1(212,281) ; v1(600.43,514) 610.43,504 OB1_U_OB_WRP2.Q@610.43,476.14
pads on no net: 0.1uF_1_U_VT_WRP1.2 0.1uF_1_U_VT_WRP2.2 0.1uF_1_U_VT_WRP3.2 0.1uF_1_U_VT_WRP4.2 0.1uF_1_U_VT_WRP5.2 0.1uF_1_U_VT_WRP6.2 0.1uF_1_U_VT_WRP7.2 0.1uF_1_U_VT_WRP8.2 0.1uF_1_U_VT_WRP9.2 0.1uF_1_U_VT_WRP10.2 0.1uF_1_U_VT_WRP11.2 0.1uF_1_U_VT_WRP12.2 0.1uF_1_U_VT_WRP13.2 0.1uF_1_U_VT_WRP14.2 0.1uF_1_U_VT_WRP15.2 0.1uF_1_U_VT_WRP16.2 0.1uF_2_U_VT_WRP1.2 0.1uF_2_U_VT_WRP2.2 0.1uF_2_U_VT_WRP3.2 0.1uF_2_U_VT_WRP4.2 0.1uF_2_U_VT_WRP5.2 0.1uF_2_U_VT_WRP6.2 0.1uF_2_U_VT_WRP7.2 0.1uF_2_U_VT_WRP8.2 0.1uF_2_U_VT_WRP9.2 0.1uF_2_U_VT_WRP10.2 0.1uF_2_U_VT_WRP11.2 0.1uF_2_U_VT_WRP12.2 0.1uF_2_U_VT_WRP13.2 0.1uF_2_U_VT_WRP14.2 0.1uF_2_U_VT_WRP15.2 0.1uF_2_U_VT_WRP16.2 SRAM1_U_SRAM_WRP1.NC1 SRAM1_U_SRAM_WRP1.NC2 SRAM1_U_SRAM_WRP1.NC3 SRAM1_U_SRAM_WRP2.NC1 SRAM1_U_SRAM_WRP2.NC2 SRAM1_U_SRAM_WRP2.NC3 SRAM1_U_SRAM_WRP3.NC1 SRAM1_U_SRAM_WRP3.NC2 SRAM1_U_SRAM_WRP3.NC3 SRAM1_U_SRAM_WRP4.NC1 SRAM1_U_SRAM_WRP4.NC2 SRAM1_U_SRAM_WRP4.NC3 SRAM1_U_SRAM_WRP5.NC1 SRAM1_U_SRAM_WRP5.NC2 SRAM1_U_SRAM_WRP5.NC3 SRAM1_U_SRAM_WRP6.NC1 SRAM1_U_SRAM_WRP6.NC2 SRAM1_U_SRAM_WRP6.NC3 SRAM1_U_SRAM_WRP7.NC1 SRAM1_U_SRAM_WRP7.NC2 SRAM1_U_SRAM_WRP7.NC3 SRAM1_U_SRAM_WRP8.NC1 SRAM1_U_SRAM_WRP8.NC2 SRAM1_U_SRAM_WRP8.NC3 ZIF1.129 ZIF1.130 ZIF1.131 ZIF1.132 ZIF1.133 ZIF1.134 ZIF1.135 ZIF1.136 ZIF1.137 ZIF1.138 ZIF1.139 ZIF1.140 ZIF1.141 ZIF1.142 ZIF1.143 ZIF1.144 ZIF1.145 ZIF1.146 ZIF1.147 ZIF1.148 ZIF1.149 ZIF1.150 ZIF1.151 ZIF1.152 ZIF1.153 ZIF1.154 ZIF1.155 ZIF1.156 ZIF1.157 ZIF1.158 ZIF1.159 ZIF1.160 ZIF1.161 ZIF1.162 ZIF1.163 ZIF1.164 ZIF1.165 ZIF1.166 ZIF1.167 ZIF1.168 ZIF1.169